# Altium PCB macropad.PcbDoc
Units mil, origin at the board's own origin, x right, y up, seen from the top; angles counter-clockwise.
Board outline 6000 x 4000 mil, 2 copper layers (Top Layer, Bottom Layer); 21 components, 29 nets, 124 pads, 0 vias.
Unrouted connection lines stored in the file: 20.
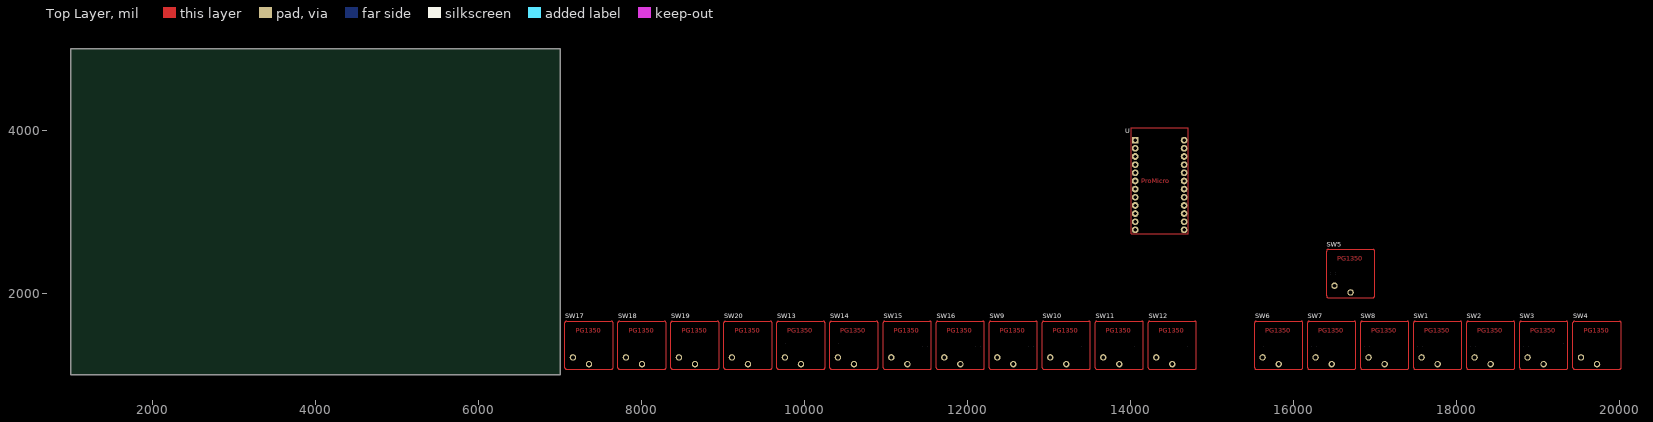
[diagram p0: Top Layer view]
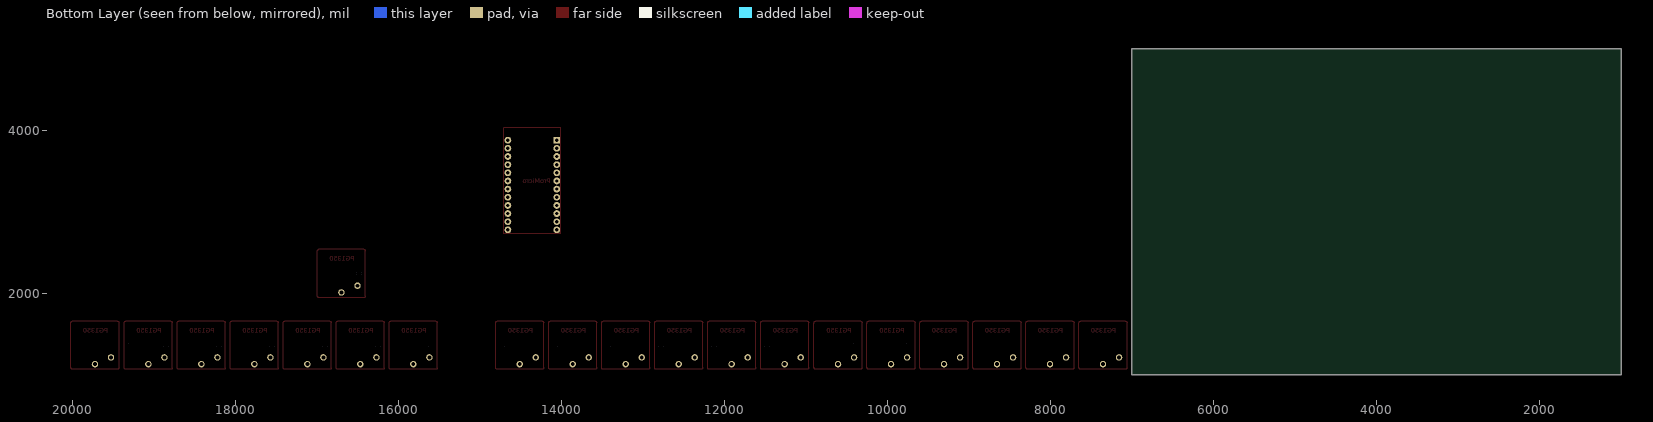
[diagram p1: Bottom Layer view, seen from below]

## Layer stack, top to bottom
Top Solder: solder mask 0.4, Solder Resist, Dk 3.5
Top Layer: signal copper 1.4
Dielectric 1: dielectric 12.6, FR-4, Dk 4.8
Bottom Layer: signal copper 1.4
Bottom Solder: solder mask 0.4, Solder Resist, Dk 3.5

## Board outline
1000,1000 7000,1000 7000,5000 1000,5000

## Design rules (kind name [scope] priority, off if disabled: settings)
Clearance [All] p1: gap=10 ignorepadtopadclearanceinfootprint=FALSE
PolygonConnect [All] p1: connectstyle=Relief reliefconductorwidth=10 reliefentries=4 polygonreliefangle="90 Angle" airgapwidth=10
RoutingVias [All] p1: holewidth=28 width=50 viastyle="Through Hole" minholewidth=28 minwidth=50 maxholewidth=28 maxwidth=50
SolderMaskExpansion [All] p1: expansion=4 istentingtop=FALSE
Width [All] p1: maxlimit=10 minlimit=10 preferedwidth=10
30 further rules are at their usual default settings.

## Components (designator, comment, footprint, x,y, rotation, side; value= is the part's Value field where it differs from the comment)
SW1 "PG1350 SW" PG1350 17765,1365 r0 top
SW2 "PG1350 SW" PG1350 18415,1365 r0 top
SW3 "PG1350 SW" PG1350 19065,1365 r0 top
SW4 "PG1350 SW" PG1350 19720,1365 r0 top
SW5 "PG1350 SW" PG1350 16696.85,2244.61 r0 top
SW6 "PG1350 SW" PG1350 15815,1365 r0 top
SW7 "PG1350 SW" PG1350 16465,1365 r0 top
SW8 "PG1350 SW" PG1350 17115,1365 r0 top
SW9 "PG1350 SW" PG1350 12560,1365 r0 top
SW10 "PG1350 SW" PG1350 13210,1365 r0 top
SW11 "PG1350 SW" PG1350 13860,1365 r0 top
SW12 "PG1350 SW" PG1350 14510,1365 r0 top
SW13 "PG1350 SW" PG1350 9955,1365 r0 top
SW14 "PG1350 SW" PG1350 10605,1365 r0 top
SW15 "PG1350 SW" PG1350 11260,1365 r0 top
SW16 "PG1350 SW" PG1350 11910,1365 r0 top
SW17 "PG1350 SW" PG1350 7355,1365 r0 top
SW18 "PG1350 SW" PG1350 8005,1365 r0 top
SW19 "PG1350 SW" PG1350 8655,1365 r0 top
SW20 "PG1350 SW" PG1350 9305,1365 r0 top
U "ProMicro" ProMicroHeaders 14355,3380 r0 top

## Footprints (in the part's own frame and the unit in brackets; to place one, negate y for a bottom-side part, rotate by r counter-clockwise, add the part's x,y. Pads: shape width x height; smd on the part's side, far side on the other; paste and mask are expansions set on the pad)
PG1350 [mm]
  round 2 hole 1.2: 1(-5,-3.8) 2(0,-5.9)
  round 1.524 hole 1.9 unplated: ""(-5.5,0)
  round 0 hole 3.4 unplated: ""(0,0)
  round 1.524 hole 1.9: ""(5.5,0)
  Top Layer lines w0.254: -7.5,-7 ccw(c-7,-7) -7,-7.5 7,-7.5 ccw(c7,-7) 7.5,-7 7.5,7 ccw(c7,7) 7,7.5 -7,7.5 ccw(c-7,7) -7.5,7 -7.5,-7
ProMicroHeaders [mm]
  rect 2.1x2.1 hole 1.02: 1(-7.62,12.7)
  round 2.1 hole 1.02: 2(-7.62,10.16) 3(-7.62,7.62) 4(-7.62,5.08) 5(-7.62,2.54) 6(-7.62,0) 7(-7.62,-2.54) 8(-7.62,-5.08) 9(-7.62,-7.62) 10(-7.62,-10.16) 11(-7.62,-12.7) 12(-7.62,-15.24) 13(7.62,-15.24) 14(7.62,-12.7) 15(7.62,-10.16) 16(7.62,-7.62) 17(7.62,-5.08) 18(7.62,-2.54) 19(7.62,0) 20(7.62,2.54) 21(7.62,5.08) 22(7.62,7.62) 23(7.62,10.16) 24(7.62,12.7)
  Top Layer lines w0.254: -8.89,-16.51 -8.89,16.51 8.89,16.51 8.89,-16.51 -8.89,-16.51

## Nets (pads, with @x,y where several pads share a name; then routed paths per layer and width w, separated by ;. In a path a pad name is that pad's centre, name@x,y a point inside that pad or via, vN(x,y) a via of type N, cw(c..) or ccw(c..) an arc to the next point about the centre after c; other vN are vias at no path point)
NetD1_1: SW1.1
NetD1_2: SW2.1
NetD2_2: SW3.1
NetD3_2: SW4.1
NetD4_2: U.19
NetD5_1: SW5.1
NetD5_2: SW6.1
NetD6_2: SW7.1
NetD7_2: SW8.1
NetD8_2: U.18
NetD9_1: SW9.1
NetD9_2: SW10.1
NetD10_2: SW11.1
NetD11_2: SW12.1
NetD12_2: U.17
NetD13_1: SW13.1
NetD13_2: SW14.1
NetD14_2: SW15.1
NetD15_2: SW16.1
NetD16_2: U.16
NetD17_1: SW17.1
NetD17_2: SW18.1
NetD18_2: SW19.1
NetD19_2: SW20.1
NetD20_2: U.15
NetSW1_2: SW1.2 SW5.2 SW9.2 SW13.2 SW17.2 U.4
NetSW2_2: SW2.2 SW6.2 SW10.2 SW14.2 SW18.2 U.5
NetSW3_2: SW3.2 SW7.2 SW11.2 SW15.2 SW19.2 U.6
NetSW4_2: SW4.2 SW8.2 SW12.2 SW16.2 SW20.2 U.7
pads on no net: SW1. SW2. SW3. SW4. SW5. SW6. SW7. SW8. SW9. SW10. SW11. SW12. SW13. SW14. SW15. SW16. SW17. SW18. SW19. SW20. U.1 U.2 U.3 U.8 U.9 U.10 U.11 U.12 U.13 U.14 U.20 U.21 U.22 U.23 U.24

## Text inside footprints (layer, text, board x,y; h text height)
SW1: Top Layer "PG1350" at 17600.05,1520.67 h60
SW2: Top Layer "PG1350" at 18250.05,1520.67 h60
SW3: Top Layer "PG1350" at 18900.05,1520.67 h60
SW4: Top Layer "PG1350" at 19555.05,1520.67 h60
SW5: Top Layer "PG1350" at 16531.9,2400.28 h60
SW6: Top Layer "PG1350" at 15650.05,1520.67 h60
SW7: Top Layer "PG1350" at 16300.05,1520.67 h60
SW8: Top Layer "PG1350" at 16950.05,1520.67 h60
SW9: Top Layer "PG1350" at 12395.05,1520.67 h60
SW10: Top Layer "PG1350" at 13045.05,1520.67 h60
SW11: Top Layer "PG1350" at 13695.05,1520.67 h60
SW12: Top Layer "PG1350" at 14345.05,1520.67 h60
SW13: Top Layer "PG1350" at 9790.05,1520.67 h60
SW14: Top Layer "PG1350" at 10440.05,1520.67 h60
SW15: Top Layer "PG1350" at 11095.05,1520.67 h60
SW16: Top Layer "PG1350" at 11745.05,1520.67 h60
SW17: Top Layer "PG1350" at 7190.05,1520.67 h60
SW18: Top Layer "PG1350" at 7840.05,1520.67 h60
SW19: Top Layer "PG1350" at 8490.05,1520.67 h60
SW20: Top Layer "PG1350" at 9140.05,1520.67 h60